# Altium PCB PowerAmplifier915MHz.PcbDoc
Units mm, origin at the board's own origin, x right, y up, seen from the top; angles counter-clockwise.
Board outline 73.81 x 51.33 mm, 2 copper layers (Top Layer, Bottom Layer), stack 1.571 mm thick; 38 components, 21 nets, 115 pads, 201 vias.
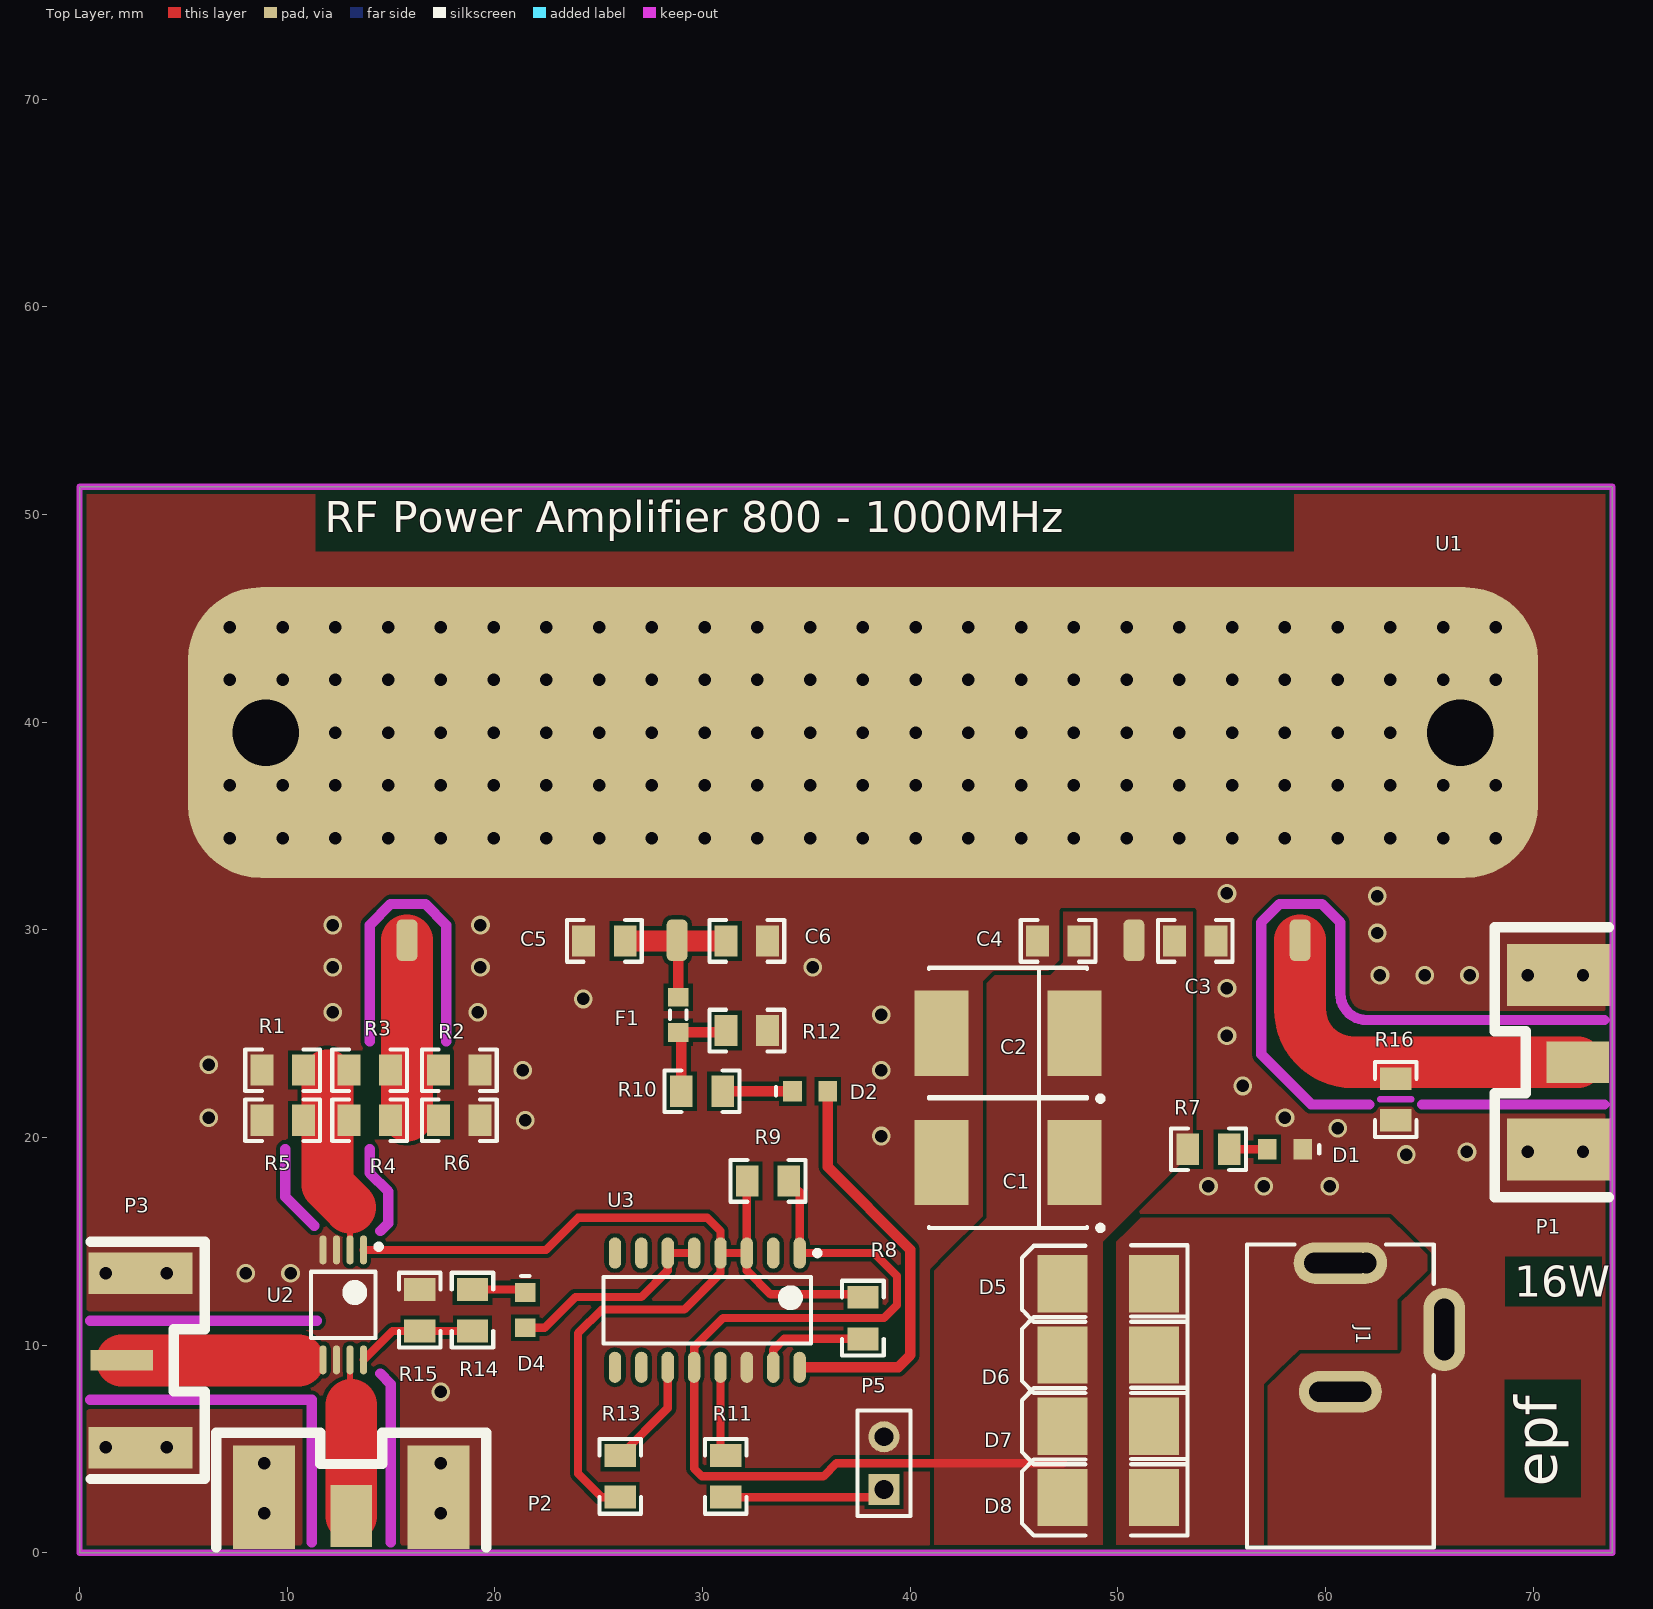
[diagram p0: Top Layer view]
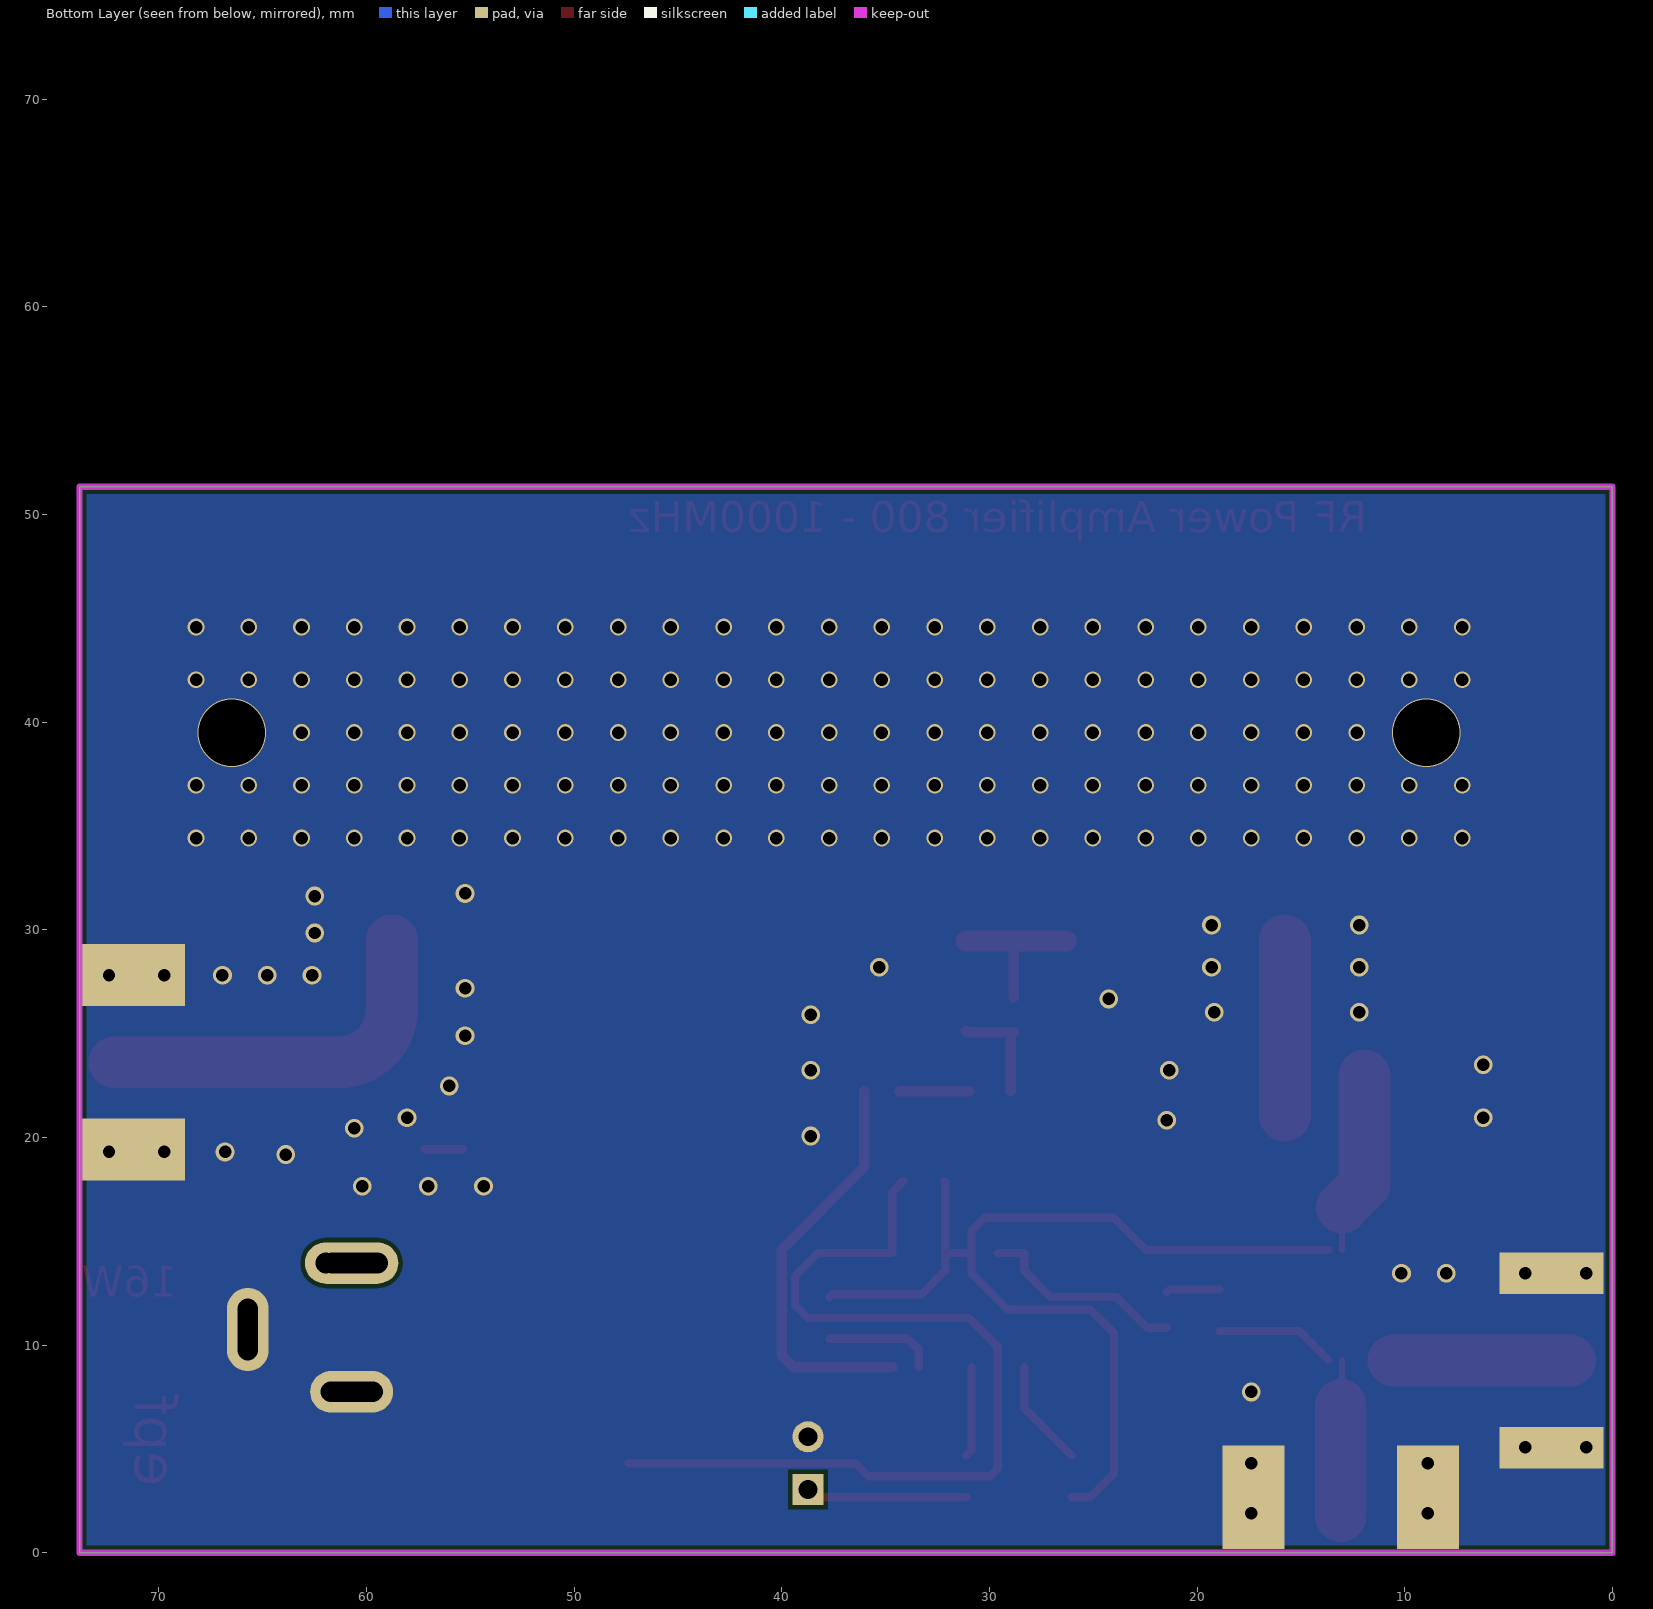
[diagram p1: Bottom Layer view, seen from below]
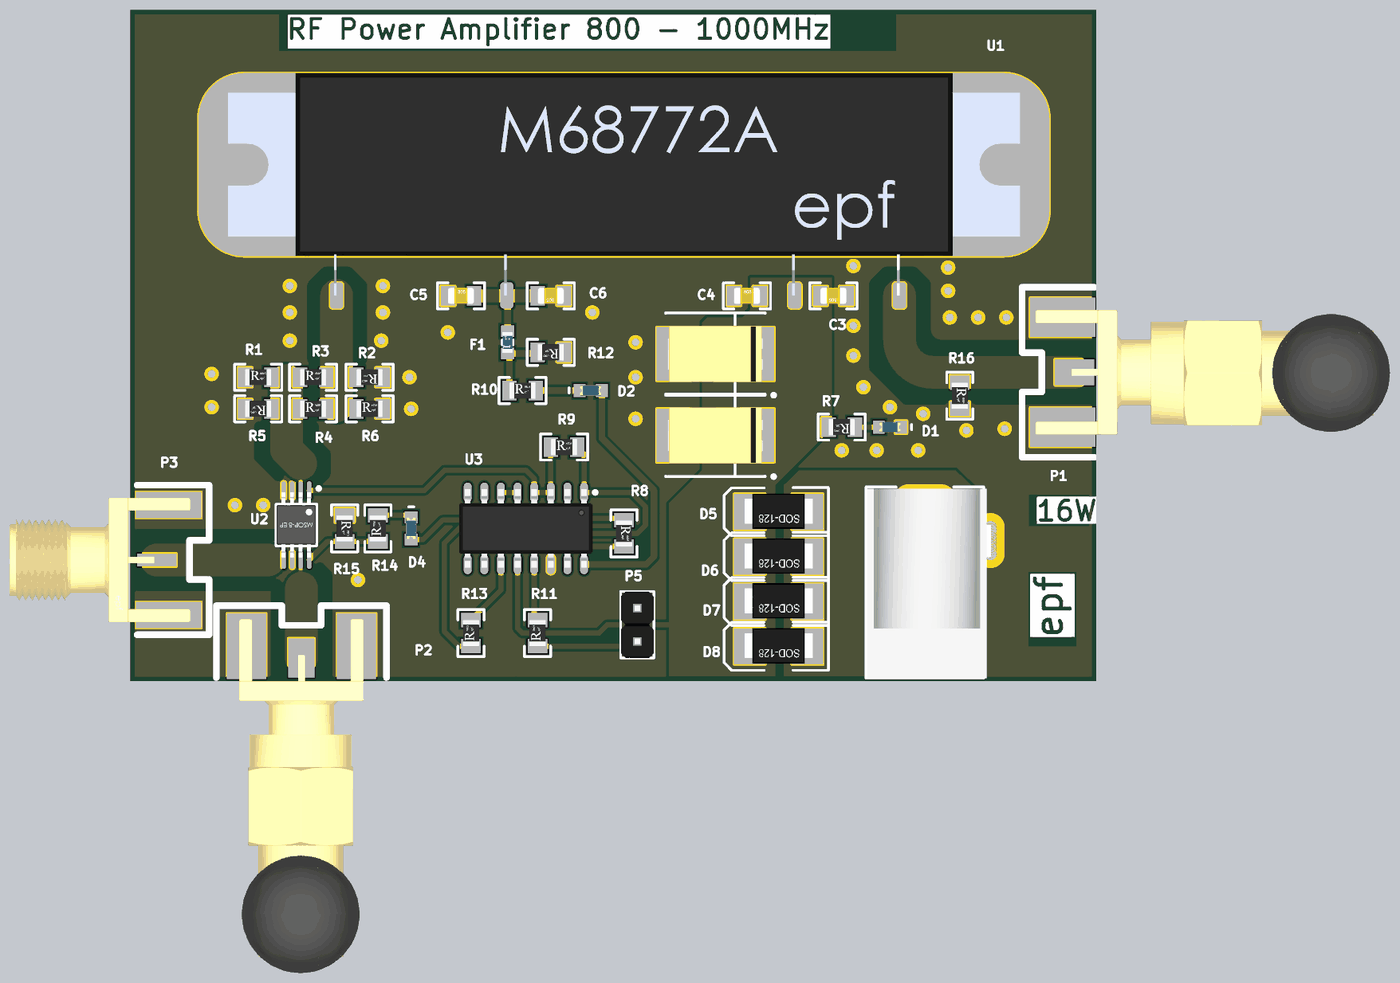
[diagram p2: 3D render of the assembled board from above, using the file's embedded part models]

## Layer stack, top to bottom
Top Layer: signal copper 0.0356
Dielectric: core 1.5, FR-4, Dk 4.8
Bottom Layer: signal copper 0.0356

## Board outline
0,0 0,51.334 73.808,51.334 73.808,0

## Design rules (kind name [scope] priority, off if disabled: settings)
Clearance [All] p1: gap=0.2
HoleSize [All] p1: absolutevalues=TRUE maxlimit=5 minlimit=0.025 maxpercent=80.000 minpercent=20.000
PlaneConnect [All] p1: planeconnectstyle=Direct reliefexpansion=0.508 reliefentries=4 reliefconductorwidth=0.254 reliefairgap=0.254
PolygonConnect [All] p1: connectstyle=Direct reliefconductorwidth=0.254 reliefentries=4 polygonreliefangle="90 Angle" airgapwidth=0.254
RoutingVias [All] p1: holewidth=0.6 width=1 viastyle="Through Hole" minholewidth=0.6 minwidth=0.6 maxholewidth=3 maxwidth=5
SilkscreenOverComponentPads [All] p1: minsilkscreentomaskgap=0.254
SolderMaskExpansion [All] p1: expansion=0.102
Width [All] p1: maxlimit=3 minlimit=0.2 preferedwidth=1
25 further rules are at their usual default settings.

## Components (designator, comment, footprint, x,y, rotation, side; value= is the part's Value field where it differs from the comment)
C1 "Cap Pol2" TC7360-2924 44.704,18.796 r180 top
C2 "Cap Pol2" TC7360-2924 44.704,25.019 r180 top
C3 "Capacitor" 0805_CAP 53.721,29.464 r180 top
C4 "Capacitor" 0805_CAP 47.117,29.464 r0 top
C5 "Capacitor" 0805_CAP 25.273,29.464 r0 top
C6 "Capacitor" 0805_CAP 32.131,29.464 r180 top
D1 "LED" LED0603 58.039,19.431 r0 top
D2 "LED" LED0603 35.179,22.225 r180 top
D4 "LED" LED0603 21.463,11.684 r90 top
D5 "MBRS130T3" MBRS130T3 49.53,12.954 r180 top
D6 "MBRS130T3" MBRS130T3 49.53,9.525 r180 top
D7 "MBRS130T3" MBRS130T3 49.53,6.096 r180 top
D8 "MBRS130T3" MBRS130T3 49.53,2.667 r180 top
F1 "Ferrita" IND0603 28.829,25.908 r90 top
J1 "PWR2.5" KLD-0202 60.706,0.254 r90 top
P1 "SMA2" SMAL_Antena 72.136,23.622 r270 top
P2 "SMA2" SMAL_Antena 13.081,1.778 r180 top
P3 "SMA2" SMAL22 2.032,9.271 r90 top
P5 "Header2" Header2Macho 38.735,3.048 r90 top
R1 "Resistor" RES0805 9.779,23.241 r0 top
R2 "Resistor" RES0805 18.288,23.241 r180 top
R3 "Resistor" RES0805 13.97,23.241 r0 top
R4 "Resistor" RES0805 13.97,20.828 r0 top
R5 "Resistor" RES0805 9.779,20.828 r180 top
R6 "Resistor" RES0805 18.288,20.828 r0 top
R7 "Resistor" RES0805 54.356,19.431 r180 top
R8 "Resistor" RES0805 37.719,11.303 r270 top
R9 "Resistor" RES0805 33.147,17.907 r0 top
R10 "Resistor" RES0805 29.972,22.225 r0 top
R11 "Resistor" RES0805 31.115,3.683 r90 top
R12 "Resistor" RES0805 32.131,25.146 r180 top
R13 "Resistor" RES0805 26.035,3.683 r90 top
R14 "Resistor" RES0805 18.923,11.684 r90 top
R15 "Resistor" RES0805 16.383,11.684 r270 top
R16 "Resistor" RES0805 63.373,21.828 r270 top
U1 "M68772A" M68772A 37.719,39.497 r0 top
U2 "UPG137GV" SOP65P640-8L 12.7,11.938 r270 top
U3 "MMPQ6700" SOIC127P602-16BN 30.226,11.684 r270 top

## Footprints (in the part's own frame and the unit in brackets; to place one, negate y for a bottom-side part, rotate by r counter-clockwise, add the part's x,y. Pads: shape width x height; smd on the part's side, far side on the other; paste and mask are expansions set on the pad)
0805_CAP [mm]
  rect 1.1x1.5 smd: 1(-1,0) 2(1,0)
  silkscreen extent -1.8,-1 1.8,1, body extent -1,-0.62 1,0.63, height 0.78
Header2Macho [mm]
  rect 1.5x1.5 hole 0.9: 1(0,0)
  round 1.5 hole 0.9: 2(2.54,0)
  silkscreen extent -1.27,-1.27 3.81,1.27, body extent -1.27,-1.25 3.81,1.25, height 8.55
IND0603 [mm] "Chip Resistor, Body 1.6x0.8mm, IPC Medium Density"
  rect 0.9x1 smd: 1(-0.85,0) 2(0.85,0)
  silkscreen extent -0.2,-0.4 0.2,0.4, body extent -0.8,-0.4 0.8,0.4, height 0.4
KLD-0202 [mm]
  oval 2x4.5 all layers, no hole: 1(13.7,0)
  round 1.5 hole 1: 1A(13.7,-1.25) 1B(13.7,1.25) 2A(7.5,-1) 2B(7.5,1) 3A(9.5,-5) 3B(11.5,-5)
  oval 2x4 all layers, no hole: 2(7.5,0)
  oval 4x2 all layers, no hole: 3(10.5,-5)
  silkscreen extent 0,-4.5 14.6,4.5, body extent -0.03,-5.05 14.45,4.42, height 11.18
LED0603 [mm]
  rect 0.9x1 smd: 1(-0.85,0) 2(0.85,0)
  silkscreen extent 1.65,-0.2 1.65,0.2, body extent -0.81,-0.4 0.81,0.4, height 0.6
M68772A [mm]
  rrect50% 1x2 smd: 1(-21.95,-10) 2(-8.95,-10) 3(13.05,-10) 4(21.05,-10)
  rrect50% 65x14 smd: 5(0,0)
  body extent -30.25,-10 30.25,7, height 6.4
MBRS130T3 [mm]
  rect 2.4x2.75 smd: 1(-2.21,0) 2(2.21,0)
  silkscreen extent -3.81,-1.85 4.16,1.83, body extent -2.6,-1.4 2.6,1.3, height 1.11
RES0805 [mm]
  rect 1.1x1.5 smd: 1(-1,0) 2(1,0)
  silkscreen extent -1.8,-1 1.8,1, body extent -1,-0.62 1,0.63, height 0.5
SMAL22 [mm]
  rect 2x5 smd: 0(-4.2,-0.9) 0(4.2,-0.9)
  rect 2x5 smd far side: 0(-4.2,-0.9) 0(4.2,-0.9)
  rect 1x3 smd: 1(0,0)
  silkscreen extent -5.71,-4 5.71,1.5, body extent -4.76,-2.57 4.76,11.26, height 4.06
SMAL_Antena [mm]
  rect 3x5 smd: 0(-4.2,-0.9) 0(4.2,-0.9)
  rect 3x5 smd far side: 0(-4.2,-0.9) 0(4.2,-0.9)
  rect 2x3 smd: 1(0,0)
  silkscreen extent -6.5,-4 6.5,1.5, body extent -4.76,-2.97 4.76,24.09, height 42.25
SOIC127P602-16BN [mm] "SOIC, 16-Leads, Body 9.9x3.9mm, Pitch 1.27mm, IPC Medium Density"
  oval 1.5x0.6 smd: 1(-2.75,4.445) 2(-2.75,3.175) 3(-2.75,1.905) 4(-2.75,0.635) 5(-2.75,-0.635) 6(-2.75,-1.905) 7(-2.75,-3.175) 8(-2.75,-4.445) 9(2.75,-4.445) 10(2.75,-3.175) 11(2.75,-1.905) 12(2.75,-0.635) 13(2.75,0.635) 14(2.75,1.905) 15(2.75,3.175) 16(2.75,4.445)
  silkscreen extent -2.87,-5 1.6,5.42, body extent -3,-5.1 3,5.1, height 1.7
SOP65P640-8L [mm] "SOP, 8-Leads, Body 3x4.4mm, Pitch 0.65mm, IPC High Density"
  oval 1.4x0.35 smd: 1(-2.648,0.975) 2(-2.648,0.325) 3(-2.648,-0.325) 4(-2.648,-0.975) 5(2.648,-0.975) 6(2.648,-0.325) 7(2.648,0.325) 8(2.648,0.975)
  silkscreen extent -2.92,-1.55 1.6,1.83, body extent -2.52,-1.52 2.48,1.48, height 1.09
TC7360-2924 [mm] "Capacitor, SM Tantalum; Body 7.3 x 6.0 mm (LxW typ)"
  rect 2.6x4.1 smd: 1(-3.2,0) 2(3.2,0)
  silkscreen extent -4.58,-3.15 3.8,3.27, body extent -3.65,-2.15 3.65,2.15, height 4.11

## Part data
C1 C2: "Polarized Capacitor (Axial)"
C3 C4 C5 C6: library part Cap
D1 D2 D4: library part LED1
D5 D6 D7 D8: "DIODO 1A 30V"
J1: "Low Voltage Power Supply Connector"
P1 P2 P3: "BNC Elbow Connector"
R1 R2 R3 R4 R5 R6 R7 R8 R9 R10 R11 R12 R13 R14 R15 R16: library part Res
U1: "AMPLIFICADOR DE POTENCIA 915MHz"
U2: "L-Band SPDT GaAs MMIC SWITCH"
U3: "Quad NPN & PNP General Purpose Amplifier"

## Via types
v1: diameter 0.8, hole 0.6, Top Layer to Bottom Layer, 121 vias
v2: diameter 0.9, hole 0.6, Top Layer to Bottom Layer, 42 vias
v3: diameter 1.5, hole 1, Top Layer to Bottom Layer, 32 vias
v4: diameter 1, hole 0.6, Top Layer to Bottom Layer, 4 vias
v5: diameter 3.3, hole 3.2, Top Layer to Bottom Layer, 2 vias

## Nets (pads, with @x,y where several pads share a name; then routed paths per layer and width w, separated by ;. In a path a pad name is that pad's centre, name@x,y a point inside that pad or via, vN(x,y) a via of type N, cw(c..) or ccw(c..) an arc to the next point about the centre after c; other vN are vias at no path point)
CNT1: R14.1 R15.2 U2.8 | length 5.8
  Top Layer w0.4: U2.8 15.069,10.684 R15.2 R14.1
CNT2: R8.1 R9.1 R13.1 U2.1 U3.3 U3.4 | length 49.2
  Top Layer w0.4: U2.1 22.46,14.586 24.003,16.129 30.226,16.129 30.861,15.494 U3.4 ; R13.1 25.13,2.683 24.003,3.81 24.003,10.576 25.146,11.719 29.118,11.719 30.861,13.462 U3.4 ; R9.1 32.131,17.891 U3.3 ; R8.1 37.576,12.446 33.274,12.446 32.131,13.589 U3.3 ; U3.4 U3.3
CONTROL: P5.1 R11.1 | length 7.8
  Top Layer w0.4: R11.1 38.37,2.683 P5.1
GND: C1.2 C2.2 C3.1 C4.1 C5.1 C6.1 D1.2 J1.2 J1.2A J1.2B J1.3 J1.3A J1.3B P1.0 P2.0 P3.0 P5.2 R1.1 R2.1 R5.2 R6.2 R12.1 R15.1 R16.2 U1.5 U2.3 U2.4 U2.6 U3.14
  other v1: 7.239,34.417 9.779,34.417 12.319,34.417 14.859,34.417 17.399,34.417 19.939,34.417 22.479,34.417 25.019,34.417 27.559,34.417 30.099,34.417 32.639,34.417 35.179,34.417 37.719,34.417 40.259,34.417 42.799,34.417 45.339,34.417 47.879,34.417 50.419,34.417 52.959,34.417 55.499,34.417 58.039,34.417 60.579,34.417 63.119,34.417 65.659,34.417 68.199,34.417 7.239,36.957 9.779,36.957 12.319,36.957 14.859,36.957 17.399,36.957 19.939,36.957 22.479,36.957 25.019,36.957 27.559,36.957 30.099,36.957 32.639,36.957 35.179,36.957 37.719,36.957 40.259,36.957 42.799,36.957 45.339,36.957 47.879,36.957 50.419,36.957 52.959,36.957 55.499,36.957 58.039,36.957 60.579,36.957 63.119,36.957 65.659,36.957 68.199,36.957 12.319,39.497 14.859,39.497 17.399,39.497 19.939,39.497 22.479,39.497 25.019,39.497 27.559,39.497 30.099,39.497 32.639,39.497 35.179,39.497 37.719,39.497 40.259,39.497 42.799,39.497 45.339,39.497 47.879,39.497 50.419,39.497 52.959,39.497 55.499,39.497 58.039,39.497 60.579,39.497 63.119,39.497 7.239,42.037 9.779,42.037 12.319,42.037 14.859,42.037 17.399,42.037 19.939,42.037 22.479,42.037 25.019,42.037 27.559,42.037 30.099,42.037 32.639,42.037 35.179,42.037 37.719,42.037 40.259,42.037 42.799,42.037 45.339,42.037 47.879,42.037 50.419,42.037 52.959,42.037 55.499,42.037 58.039,42.037 60.579,42.037 63.119,42.037 65.659,42.037 68.199,42.037 7.239,44.577 9.779,44.577 12.319,44.577 14.859,44.577 17.399,44.577 19.939,44.577 22.479,44.577 25.019,44.577 27.559,44.577 30.099,44.577 32.639,44.577 35.179,44.577 37.719,44.577 40.259,44.577 42.799,44.577 45.339,44.577 47.879,44.577 50.419,44.577 52.959,44.577 55.499,44.577 58.039,44.577 60.579,44.577 63.119,44.577 65.659,44.577 68.199,44.577
  other v2: 8.89,1.905 17.399,1.905 8.89,4.318 17.399,4.318 17.399,7.747 8.001,13.462 10.16,13.462 54.356,17.653 57.023,17.653 60.198,17.653 63.881,19.177 66.802,19.304 69.723,19.304 72.39,19.304 38.608,20.066 60.579,20.447 21.463,20.828 6.223,20.955 58.039,20.955 56.007,22.479 21.336,23.241 38.608,23.241 6.223,23.495 55.245,24.892 38.608,25.908 12.192,26.035 19.177,26.035 24.257,26.67 55.245,27.178 62.611,27.813 64.77,27.813 66.929,27.813 69.723,27.813 72.39,27.813 12.192,28.194 19.304,28.194 35.306,28.194 62.484,29.845 12.192,30.226 19.304,30.226 62.484,31.623 55.245,31.75
  other v3: 59.706,7.754 59.906,7.754 60.106,7.754 60.306,7.754 60.506,7.754 60.706,7.754 60.906,7.754 61.106,7.754 61.306,7.754 61.506,7.754 65.706,9.754 65.706,9.954 65.706,10.154 65.706,10.354 65.706,10.554 65.706,10.754 65.706,10.954 65.706,11.154 65.706,11.354 65.706,11.554
  other v4: 1.27,5.08 4.191,5.08 1.27,13.462 4.191,13.462
  other v5: 8.969,39.497 66.469,39.497
NetD1_1: D1.1 R7.1 | length 1.8
  Top Layer w0.4: R7.1 D1.1
NetD2_1: D2.1 U3.16 | length 19.9
  Top Layer w0.5: U3.16 39.414,8.934 40.005,9.525 40.005,14.605 36.029,18.581 D2.1
NetD2_2: D2.2 R10.2 | length 3.4
  Top Layer w0.5: R10.2 D2.2
NetD4_1: D4.1 U3.5 U3.6 | length 10.1
  Top Layer w0.4: D4.1 22.391,10.834 23.876,12.319 27.051,12.319 28.321,13.589 U3.6 U3.5
NetD4_2: D4.2 R14.2 | length 2.6
  Top Layer w0.4: R14.2 21.313,12.684 D4.2
NetD5_1: D5.1 D6.1 D7.1 D8.1 J1.1 J1.1A J1.1B
  other v3: 59.456,13.954 59.656,13.954 59.856,13.954 60.056,13.954 60.256,13.954 60.456,13.954 60.656,13.954 60.856,13.954 61.056,13.954 61.256,13.954 61.456,13.954 61.656,13.954
NetF1_1: F1.1 R10.1 R12.2 | length 5.2
  Top Layer w0.5: R10.1 28.972,24.915 F1.1 31.043,25.058 R12.2
NetP1_1: P1.1 R16.1 U1.4 | length 18.2
  Top Layer w2.5: U1.4 58.769,26.162 ccw(c61.309,26.162) 61.309,23.622 P1.1
NetP2_1: P2.1 U2.7 | length 7.5
  Top Layer w0.3: U2.7 13.025,7.168 13.081,7.112
  Top Layer w2.5: P2.1 13.081,7.112
NetP3_1: P3.1 U2.5 | length 8.5
  Top Layer w2.5: P3.1 10.541,9.271
NetR2_2: R2.2 R3.2 R4.2 R6.1 U1.1 | length 8.4
  Top Layer w2.5: 15.769,21.061 U1.1
NetR8_2: R8.2 U3.15 | length 5.4
  Top Layer w0.4: U3.15 33.401,9.779 33.925,10.303 R8.2
NetR11_2: R11.2 U3.13 | length 4.4
  Top Layer w0.4: U3.13 30.861,4.937 R11.2
NetR13_2: R13.2 U3.11 | length 5.2
  Top Layer w0.4: R13.2 28.321,6.969 U3.11
OUT2: R1.2 R3.1 R4.1 R5.1 U2.2 | length 8.9
  Top Layer w0.3: U2.2 13.025,16.637
  Top Layer w2.5: 11.938,22.987 11.938,17.724 13.025,16.637
VCC: C1.1 C2.1 C3.2 C4.2 D5.2 D6.2 D7.2 D8.2 R7.2 R9.2 U1.3 U3.1 U3.12 | length 44.9
  Top Layer w0.4: R9.2 34.671,17.383 U3.1 38.256,14.434 39.355,13.335 39.355,11.923 38.735,11.303 30.988,11.303 29.591,9.906 U3.12 29.591,4.064 29.972,3.683 35.814,3.683 36.449,4.318 47.371,4.318
VG: C5.2 C6.2 F1.2 U1.2 | length 7.6
  Top Layer w0.5: U1.2 28.802,29.464 28.829,29.437 F1.2
  Top Layer w1: C5.2 28.802,29.464 C6.2
pads on no net: U3.2 U3.7 U3.8 U3.9 U3.10

## Polygon pours and split planes (outlines as drawn)
NetD5_1 on Top Layer "TOPVIN" (solid, remove dead copper, pour order 2): 49.911,0.381 49.911,13.589 49.911,14.986 50.437,15.494 51.094,16.129 63.057,16.129 64.897,14.351 64.897,13.589 63.977,12.7 63.451,12.192 63.451,9.779 58.719,9.779 57.667,8.763 57.01,8.128 57.01,0.381
VCC on Top Layer "TOPVCC" (solid, remove dead copper, pour order 4): 49.276,0.381 49.276,14.986 53.594,19.304 53.594,30.861 47.371,30.861 47.371,28.448 46.736,27.813 44.069,27.813 43.688,27.432 43.688,16.129 41.148,13.589 41.148,0.381
GND on Top Layer "TOPGND" (solid, remove dead copper, pour order 6): 0,0 0,51.334 73.808,51.334 73.808,0
GND on Bottom Layer "BOTTOMGND" (solid, remove dead copper, pour order 8): 0,0 0,51.334 73.808,51.334 73.808,0

## Keep-outs
Top Layer:
  lines w0.3: 62.611,21.844 64.135,21.844
  lines w0.5: 0.508,7.366 11.176,7.366 11.176,0.508 ; 0.508,11.176 11.43,11.176 ; 9.906,19.431 9.906,17.145 11.303,15.748 ; 13.97,19.431 13.97,18.288 14.859,17.399 14.859,15.875 14.478,15.494 ; 13.97,24.638 13.97,30.226 14.986,31.242 16.637,31.242 17.653,30.226 17.653,24.638 ; 14.478,8.636 14.986,8.128 14.986,0.508 ; 62.103,21.59 59.309,21.59 56.896,24.003 56.896,24.765 56.896,30.353 57.785,31.242 59.817,31.242 60.706,30.353 60.706,26.924 ccw(c61.976,26.924) 61.976,25.654 73.406,25.654 ; 64.643,21.59 73.406,21.59
Keep-Out Layer:
  the board outline again, w0.3

## Other copper
Top Layer:
  text "RF Power Amplifier 800 - 1000MHz" at 11.811,49.149 h1.5
  text "16W" at 69.088,12.319 h1.5
  text "epf" at 71.12,3.175 h2 r90

## Silkscreen, mask and mechanical layers (free items; w line width, h text height)
Top Overlay:
  text "RF Power Amplifier 800 - 1000MHz" at 11.811,49.149 h1.5
  text "16W" at 69.088,12.319 h1.5
  text "epf" at 71.12,3.175 h2 r90

## Dimensions
0,0 to 0,51.334 on Mechanical 1
0,0 to 73.808,0 on Mechanical 1

## Text inside footprints (layer, text, board x,y; h text height)
J1: Mechanical 1 "Alert PCB fab to slot details" at 54.64,0.54 h0.3 r90; Mechanical 1 "Assign keep-out area to slot" at 54.14,0.54 h0.3 r90; Mechanical 1 "Mech 1 - Slot cut-out" at 55.14,0.54 h0.3 r90; Mechanical 1 "Mech 2 - Clearance, move to internal plane if present" at 55.64,0.54 h0.3 r90